# EAGLE board front_7_ea7gib8 (EAGLE 7.6.0)
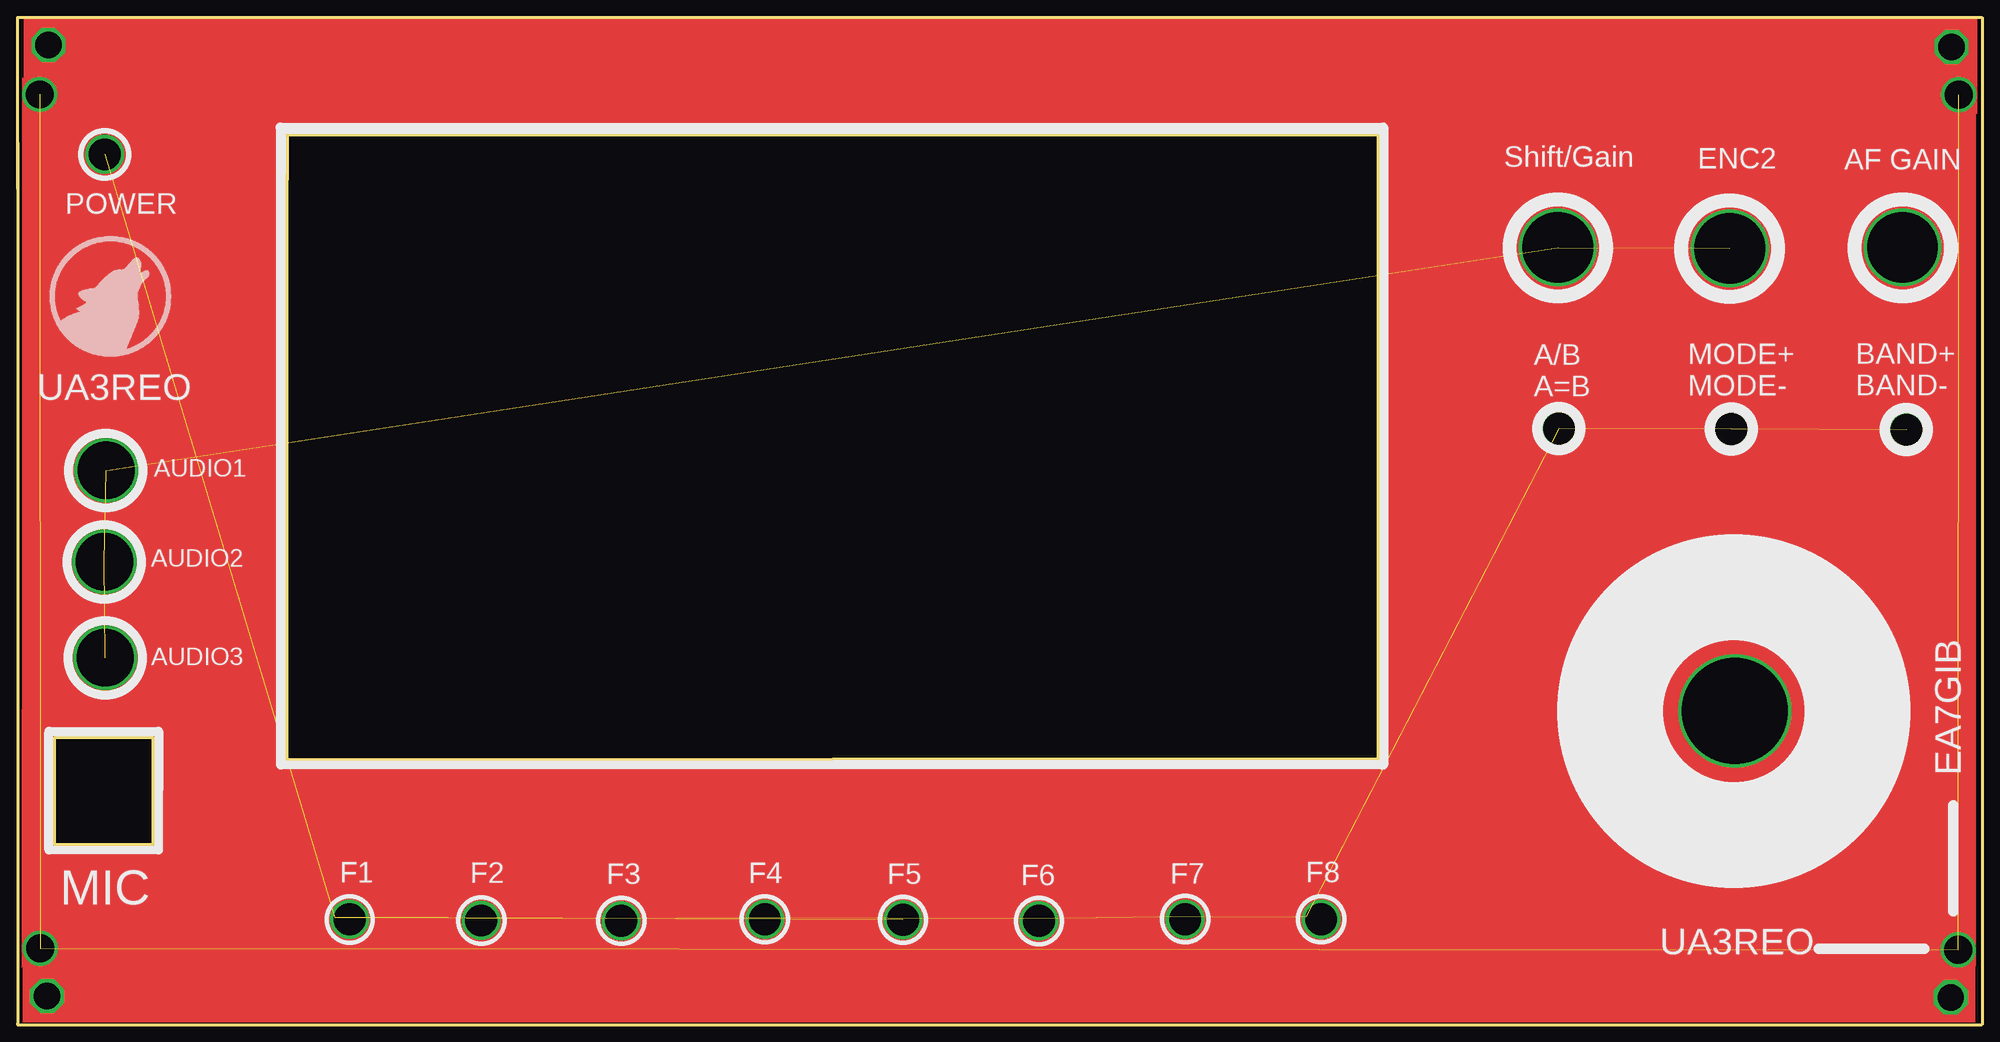
[diagram p0: board, top side]
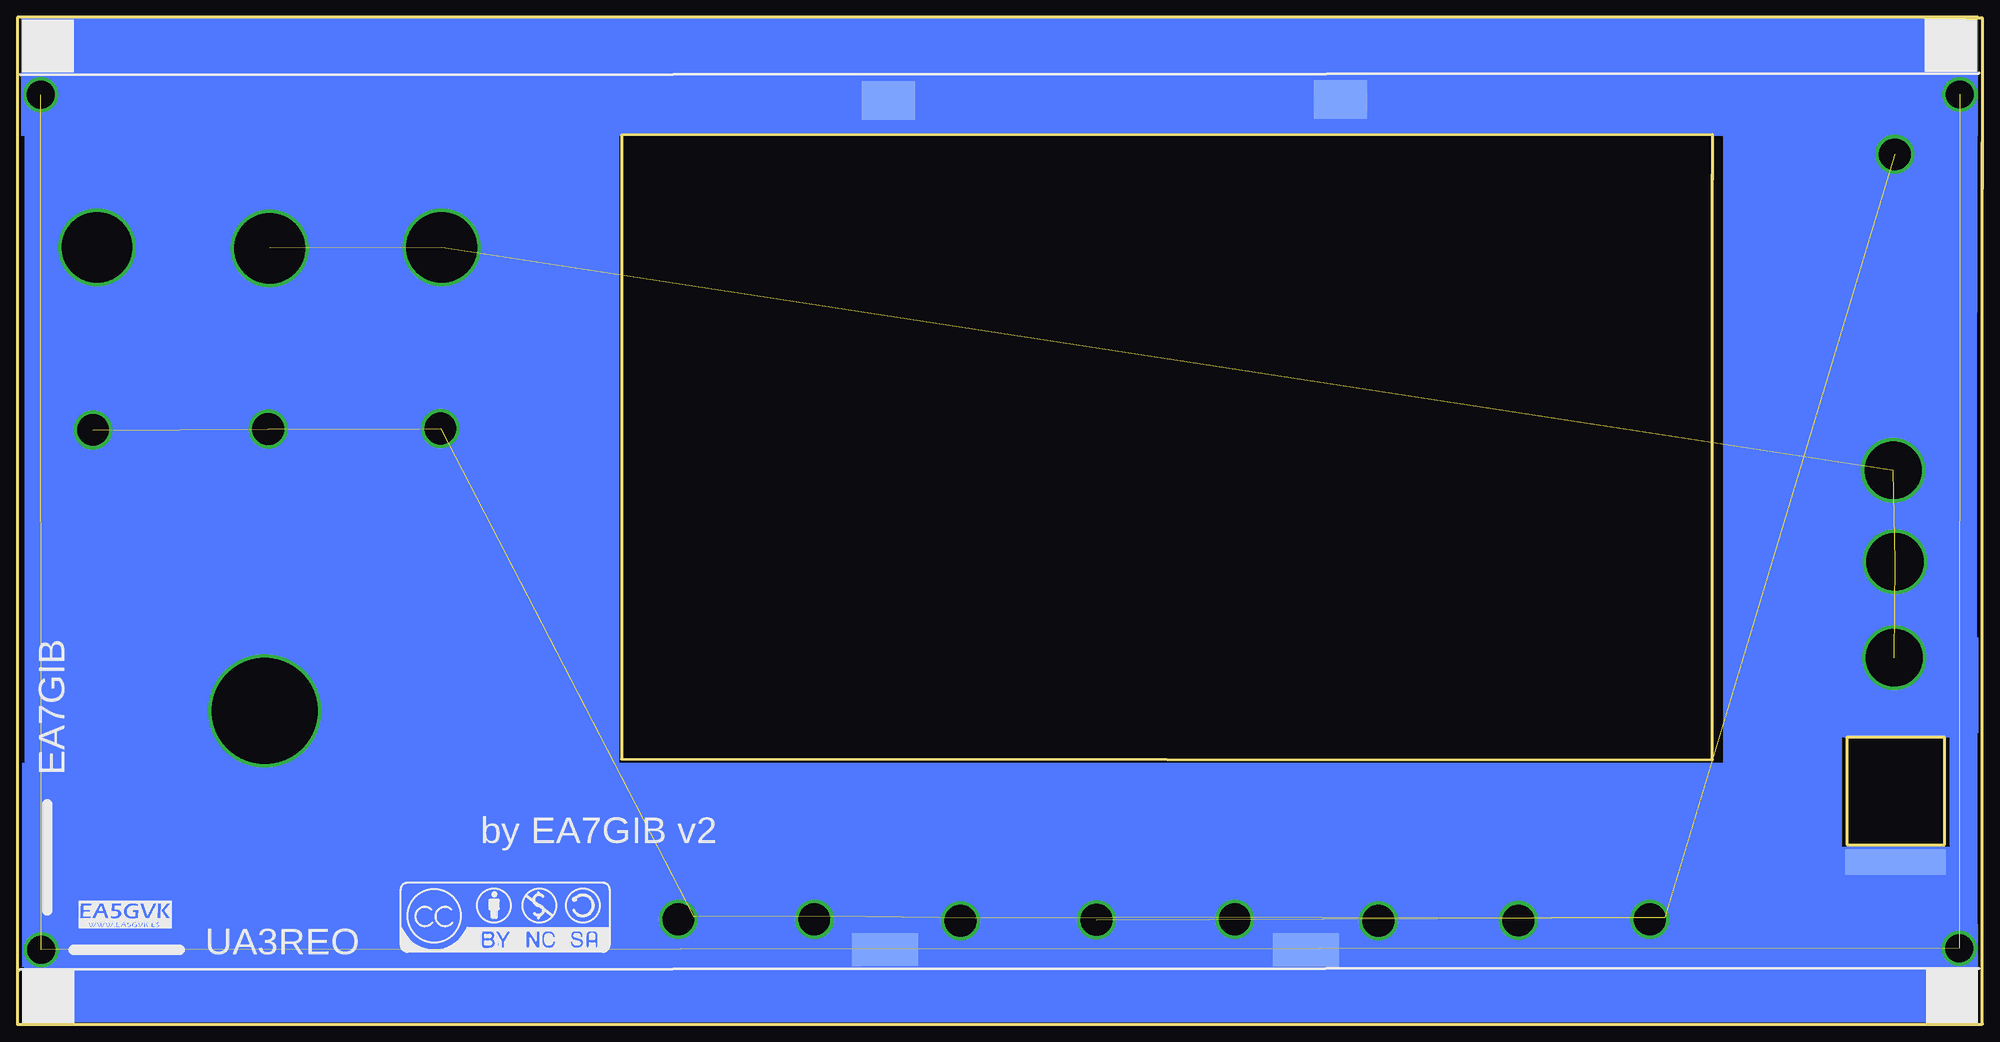
[diagram p1: board, bottom side, seen from below]

Size 282.64 x 144.93 mm. Coordinates in mm from the lower left corner, seen from the top.
Outline: 38.81,122.37 38.81,38.12 195.73,38.23 195.75,127.97 38.79,128.03 38.79,121.51
Outline: 0.58,144.93 282.64,144.93 282.64,0 0,0 0,0.18 0.03,0.18 0.03,126.92
Outline: 2.35,144.9 0,144.9 0,120.24
Outline: 5.41,41.35 19.46,41.35 19.46,25.87 5.41,25.87 5.41,41.35
Copper layers (1*16): Top 0.035mm / dielectric 1.5mm / Bottom 0.035mm
Design rules "default": minimum track width 10mil, minimum drill 24mil, track to track 8mil, track to pad 8mil, pad to pad 8mil, via to via 8mil, smd to smd 8mil, copper to edge 40mil, drill to drill 8mil, minimum pad ring 10mil, minimum via ring 8mil, stop-mask expansion 4mil, vias tented up to drill 0mil, thermal gap 10mil

## Footprints (pad centres in the part's own frame; a part is rotated, then mirrored left to right if it is on the bottom)
SMD1,27-2,54 = smd 1.27 x 2.54: 1 0,0

## Placement (x,y rotation side)
E$1  [CC-NC-BY]  227.47,10.45 0 bottom
E$2  [SMD1,27-2,54]  97.48,9.75 0 bottom
E$3  [SMD1,27-2,54]  93.18,10.88 0 bottom
E$4  [SMD1,27-2,54]  93.21,9.72 0 bottom
E$5  [SMD1,27-2,54]  96.35,10.88 0 bottom
E$6  [SMD1,27-2,54]  99.61,9.72 0 bottom
E$7  [SMD1,27-2,54]  99.64,10.88 0 bottom
E$8  [SMD1,27-2,54]  94.27,10.85 0 bottom
E$9  [SMD1,27-2,54]  156.12,10.45 0 bottom
E$10  [SMD1,27-2,54]  7.89,23.96 0 bottom
E$11  [SMD1,27-2,54]  157.19,10.45 0 bottom
E$12  [SMD1,27-2,54]  10.3,23.96 0 bottom
E$13  [SMD1,27-2,54]  11.43,23.96 0 bottom
E$14  [SMD1,27-2,54]  91.14,132.77 0 bottom
E$15  [SMD1,27-2,54]  93.54,132.77 0 bottom
E$16  [SMD1,27-2,54]  95.22,10.88 0 bottom
E$17  [SMD1,27-2,54]  7.89,22.8 0 bottom
E$18  [SMD1,27-2,54]  97.63,10.88 0 bottom
E$19  [SMD1,27-2,54]  98.76,10.88 0 bottom
E$20  [EA5GVK1]  273.8,13.9 0 bottom
E$21  [SMD1,27-2,54]  10.73,23.96 0 bottom
E$22  [SMD1,27-2,54]  13.14,23.96 0 bottom
E$23  [SMD1,27-2,54]  14.26,23.96 0 bottom
E$24  [SMD1,27-2,54]  95.22,9.72 0 bottom
E$25  [SMD1,27-2,54]  96.32,9.72 0 bottom
E$26  [SMD1,27-2,54]  10.73,22.8 0 bottom
E$27  [SMD1,27-2,54]  98.76,9.72 0 bottom
E$28  [SMD1,27-2,54]  11.83,22.8 0 bottom
E$29  [SMD1,27-2,54]  94.21,9.72 0 bottom
E$30  [SMD1,27-2,54]  14.26,22.8 0 bottom
E$31  [SMD1,27-2,54]  158.22,10.45 0 bottom
E$32  [SMD1,27-2,54]  159.44,10.45 0 bottom
E$33  [SMD1,27-2,54]  160.63,10.45 0 bottom
E$34  [SMD1,27-2,54]  161.76,10.45 0 bottom
E$35  [SMD1,27-2,54]  9.72,22.8 0 bottom
E$36  [SMD1,27-2,54]  8.69,23.96 0 bottom
E$37  [SMD1,27-2,54]  8.72,22.8 0 bottom
E$38  [SMD1,27-2,54]  15.12,22.8 0 bottom
E$39  [SMD1,27-2,54]  8.99,22.8 0 bottom
E$40  [SMD1,27-2,54]  11.43,22.8 0 bottom
E$41  [SMD1,27-2,54]  6.89,22.8 0 bottom
E$42  [SMD1,27-2,54]  5.85,23.96 0 bottom
E$43  [SMD1,27-2,54]  15.15,23.96 0 bottom
E$44  [SMD1,27-2,54]  5.88,22.8 0 bottom
E$45  [SMD1,27-2,54]  12.98,22.83 0 bottom
E$46  [SMD1,27-2,54]  94.67,132.77 0 bottom
E$47  [SMD1,27-2,54]  91.14,134.63 0 bottom
E$48  [SMD1,27-2,54]  92.35,134.63 0 bottom
E$49  [SMD1,27-2,54]  93.57,134.63 0 bottom
E$50  [SMD1,27-2,54]  94.67,134.63 0 bottom
E$51  [SMD1,27-2,54]  91.14,131.61 0 bottom
E$52  [SMD1,27-2,54]  92.23,131.61 0 bottom
E$53  [SMD1,27-2,54]  93.51,131.61 0 bottom
E$54  [SMD1,27-2,54]  94.67,131.61 0 bottom
E$55  [SMD1,27-2,54]  90.13,134.14 0 bottom
E$56  [SMD1,27-2,54]  90.13,131.61 0 bottom
E$57  [SMD1,27-2,54]  90.13,134.63 0 bottom
E$58  [SMD1,27-2,54]  92.32,133.23 0 bottom
E$59  [SMD1,27-2,54]  89.12,134.63 0 bottom
E$60  [SMD1,27-2,54]  89.09,132.77 0 bottom
E$61  [SMD1,27-2,54]  89.12,131.61 0 bottom
E$62  [SMD1,27-2,54]  95.52,134.63 0 bottom
E$63  [SMD1,27-2,54]  95.52,131.61 0 bottom
E$64  [SMD1,27-2,54]  95.55,132.77 0 bottom
E$65  [SMD1,27-2,54]  156.18,132.62 0 bottom
E$66  [SMD1,27-2,54]  158.59,132.62 0 bottom
E$67  [SMD1,27-2,54]  159.72,132.62 0 bottom
E$68  [SMD1,27-2,54]  156.18,134.48 0 bottom
E$69  [SMD1,27-2,54]  157.4,134.48 0 bottom
E$70  [SMD1,27-2,54]  158.62,134.48 0 bottom
E$71  [SMD1,27-2,54]  159.72,134.48 0 bottom
E$72  [SMD1,27-2,54]  156.18,131.46 0 bottom
E$73  [SMD1,27-2,54]  157.28,131.46 0 bottom
E$74  [SMD1,27-2,54]  158.56,131.46 0 bottom
E$75  [SMD1,27-2,54]  159.72,131.46 0 bottom
E$76  [SMD1,27-2,54]  155.17,133.99 0 bottom
E$77  [SMD1,27-2,54]  155.17,131.46 0 bottom
E$78  [SMD1,27-2,54]  155.17,134.48 0 bottom
E$79  [SMD1,27-2,54]  157.37,133.08 0 bottom
E$80  [SMD1,27-2,54]  154.17,134.48 0 bottom
E$81  [SMD1,27-2,54]  154.14,132.62 0 bottom
E$82  [SMD1,27-2,54]  154.17,131.46 0 bottom
E$83  [SMD1,27-2,54]  160.57,134.48 0 bottom
E$84  [SMD1,27-2,54]  160.57,131.46 0 bottom
E$85  [SMD1,27-2,54]  160.6,132.62 0 bottom
E$86  [SMD1,27-2,54]  11.86,23.96 0 bottom
E$87  [SMD1,27-2,54]  9.78,23.93 0 bottom
E$88  [SMD1,27-2,54]  100.4,10.88 0 bottom
E$89  [SMD1,27-2,54]  100.43,9.72 0 bottom
E$90  [SMD1,27-2,54]  101.38,10.88 0 bottom
E$91  [SMD1,27-2,54]  101.38,9.69 0 bottom
E$92  [SMD1,27-2,54]  155.75,10.88 0 bottom
E$93  [SMD1,27-2,54]  93.82,12.53 270 bottom
E$94  [SMD1,27-2,54]  96.04,12.53 270 bottom
E$95  [SMD1,27-2,54]  98.27,12.53 270 bottom
E$96  [SMD1,27-2,54]  100.77,12.53 270 bottom
E$97  [SMD1,27-2,54]  93.18,9.6 180 bottom
E$98  [SMD1,27-2,54]  95.07,8.96 270 bottom
E$99  [SMD1,27-2,54]  97.51,8.96 270 bottom
E$100  [SMD1,27-2,54]  99.91,8.96 270 bottom
E$101  [SMD1,27-2,54]  100.77,8.96 270 bottom
E$102  [SMD1,27-2,54]  158.16,10.88 0 bottom
E$103  [SMD1,27-2,54]  159.29,10.88 0 bottom
E$104  [SMD1,27-2,54]  155.75,9.72 0 bottom
E$105  [SMD1,27-2,54]  156.85,9.72 0 bottom
E$106  [SMD1,27-2,54]  159.29,9.72 0 bottom
E$107  [SMD1,27-2,54]  154.75,9.72 0 bottom
E$108  [SMD1,27-2,54]  153.71,10.88 0 bottom
E$109  [SMD1,27-2,54]  153.74,9.72 0 bottom
E$110  [SMD1,27-2,54]  160.14,9.72 0 bottom
E$111  [SMD1,27-2,54]  160.17,10.88 0 bottom
E$112  [SMD1,27-2,54]  158.01,9.75 0 bottom
E$113  [SMD1,27-2,54]  156.88,10.88 0 bottom
E$114  [SMD1,27-2,54]  154.81,10.85 0 bottom
E$115  [SMD1,27-2,54]  160.93,10.88 0 bottom
E$116  [SMD1,27-2,54]  160.96,9.72 0 bottom
E$117  [SMD1,27-2,54]  161.91,10.88 0 bottom
E$118  [SMD1,27-2,54]  161.91,9.69 0 bottom
E$119  [SMD1,27-2,54]  154.35,12.53 270 bottom
E$120  [SMD1,27-2,54]  156.58,12.53 270 bottom
E$121  [SMD1,27-2,54]  158.8,12.53 270 bottom
E$122  [SMD1,27-2,54]  161.3,12.53 270 bottom
E$123  [SMD1,27-2,54]  12.28,22.8 0 bottom
E$124  [SMD1,27-2,54]  12.31,23.96 0 bottom
E$125  [SMD1,27-2,54]  10.15,22.83 0 bottom
E$126  [SMD1,27-2,54]  9.02,23.96 0 bottom
E$127  [SMD1,27-2,54]  6.95,23.93 0 bottom
E$128  [SMD1,27-2,54]  14.66,23.96 0 bottom
E$129  [SMD1,27-2,54]  17.07,23.96 0 bottom
E$130  [SMD1,27-2,54]  18.2,23.96 0 bottom
E$131  [SMD1,27-2,54]  14.66,22.8 0 bottom
E$132  [SMD1,27-2,54]  15.76,22.8 0 bottom
E$133  [SMD1,27-2,54]  18.2,22.8 0 bottom
E$134  [SMD1,27-2,54]  13.66,22.8 0 bottom
E$135  [SMD1,27-2,54]  12.62,23.96 0 bottom
E$136  [SMD1,27-2,54]  12.65,22.8 0 bottom
E$137  [SMD1,27-2,54]  19.05,22.8 0 bottom
E$138  [SMD1,27-2,54]  19.08,23.96 0 bottom
E$139  [SMD1,27-2,54]  16.92,22.83 0 bottom
E$140  [SMD1,27-2,54]  15.79,23.96 0 bottom
E$141  [SMD1,27-2,54]  13.72,23.93 0 bottom
E$142  [SMD1,27-2,54]  16.79,22.16 90 bottom

## Library data of the parts
E$1 = cc-by-nc-sa
E$2-E$19 E$21-E$142 = wirepad
E$20 = LOGOS_BLAS1

## Tracks (layer width: path | path; a pad name or v marks a point on that pad's centre or on a via)
S$1  (via drill 15.24 pad 1.27)
  other vias: 247.08,45.12
S$2  (via drill 10.16, 8.26)  (4 unrouted)
  other vias: 246.35,111.7 221.61,111.82 12.79,79.76 12.52,66.61 12.64,52.79
S$3  (via drill 10.16)
  other vias: 271.17,111.82
S$4  (via drill 4.57)  (12 unrouted)
  other vias: 12.56,125.22 221.78,85.76 246.56,85.7 271.77,85.58 127.42,15.08 47.8,15.14 66.73,14.99 86.85,14.96 107.51,15.14 146.98,14.93 167.98,15.17 187.55,15.17
S$5  (via drill 4)  (3 unrouted)
  other vias: 279.22,10.76 279.26,133.82 3.24,133.85 3.3,10.98
S$7  (via drill 3.81 pad 1.68)
  other vias: 4.45,140.94
S$8
  Top 0.406: 226.8,50.23 272.25,50.23 272.25,50.08
S$9  (via drill 3.81)
  other vias: 278.25,140.7
S$10  (via drill 3.81)
  other vias: 4.27,4.08
S$11  (via drill 3.81)
  other vias: 278.13,3.93
(copper drawn outside any net)
  shapes: Bottom area x20, Top area x24

## Text on the board
tPlace: Shift/Gain | ENC2 | AF GAIN | POWER | UA3REO | A/B / A=B | MODE+ / MODE- | BAND+ / BAND- | AUDIO1 | AUDIO2 | AUDIO3 | EA7GIB | F1 | F2 | F3 | F4 | F5 | F6 | F7 | F8 | MIC | UA3REO | C:/Users/User/Desktop/LOBO.bmp
bPlace: EA7GIB | by EA7GIB v2 | UA3REO